# Altium PCB Inverter Processor PCB.PcbDoc (part 2 of 3)
Units mm, origin at the board's own origin, x right, y up, seen from the top; angles counter-clockwise.
Board outline 180 x 80 mm, 4 copper layers (Top Layer, Internal Plane 1, Internal Plane 2, Bottom Layer); 207 components, 146 nets, 658 pads, 294 vias.
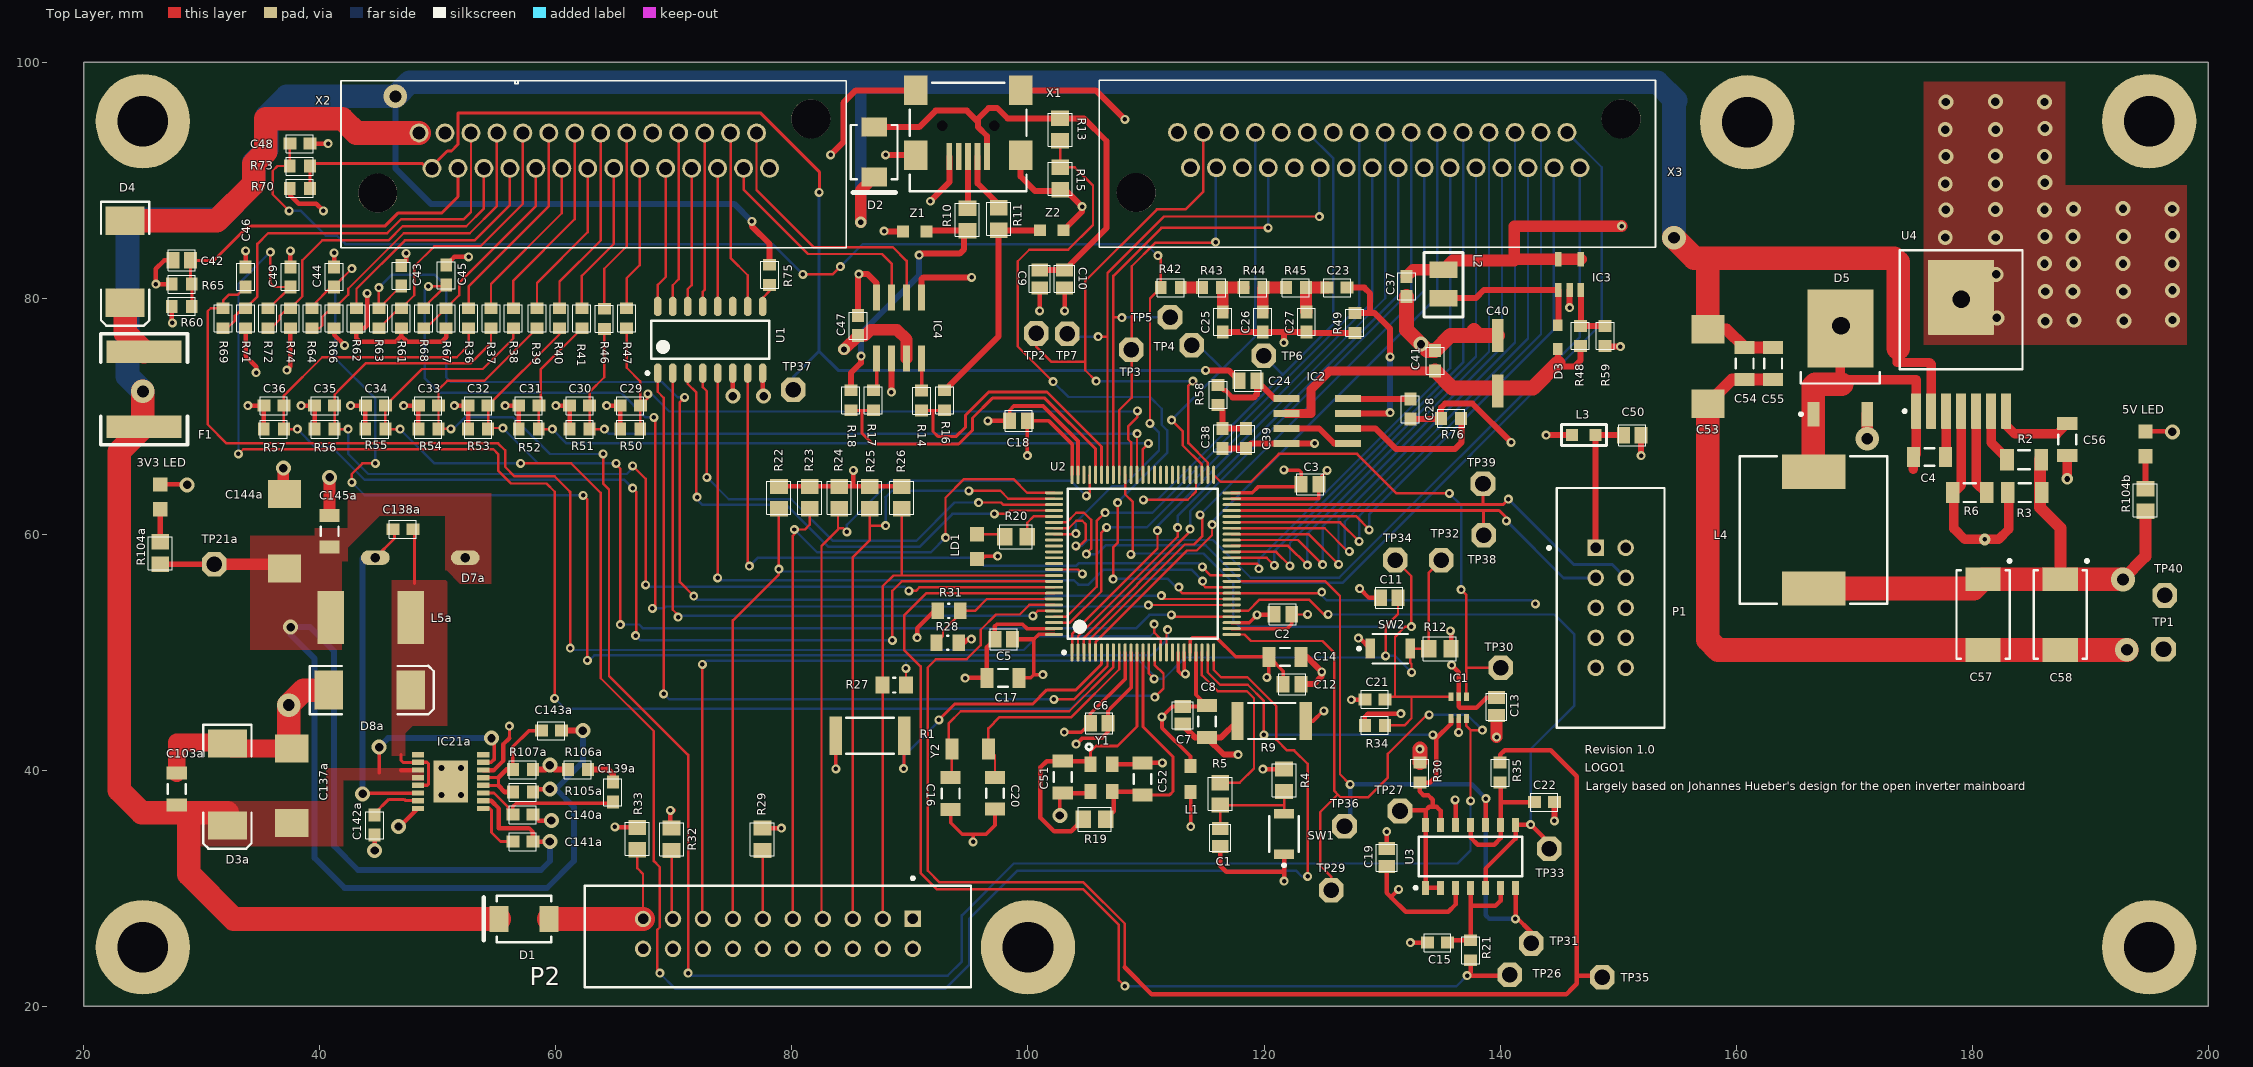
[diagram p0: Top Layer view]

## Via types
v1: diameter 0.762, hole 0.381, Top Layer to Bottom Layer, 220 vias
v2: diameter 1.27, hole 0.711, Top Layer to Bottom Layer, 56 vias
v3: diameter 1, hole 0.5, Top Layer to Bottom Layer, 7 vias
v4: diameter 2, hole 1, Top Layer to Bottom Layer, 7 vias
v5: diameter 3, hole 1.5, Top Layer to Bottom Layer, 2 vias
v6: diameter 1.27, hole 0.7, Top Layer to Bottom Layer, 1 vias
v7: diameter 1, hole 0.381, Top Layer to Bottom Layer, 1 vias

## Nets (pads, with @x,y where several pads share a name; then routed paths per layer and width w, separated by ;. In a path a pad name is that pad's centre, name@x,y a point inside that pad or via, vN(x,y) a via of type N, cw(c..) or ccw(c..) an arc to the next point about the centre after c; other vN are vias at no path point) (continued)
DGND: (continued)
  Top Layer w0.381: 26.472,64.222 28.724,64.222 v2(28.758,64.188) ; R65.1@27.45,81.2 v1(26.1,81.2) 26.1,82.5 26.8,83.2 C42.2@27.55,83.2 ; D3a.1@32.073,42.344 D3a.1@32.154,42.263 D3a.1@32.581,41.836 ; R71.1@33.7,77.45 33.7,75.1 34.6,74.2 v1(34.6,73.7) ; C46.2@33.7,82.65 v1(33.7,84) ; v1@33.9,70.9 C36.2@35.251,70.9 R57.1@35.25,68.9 R57.1@35.25,68.9 ; v1(37.2,73.9) 37.5,74.2 R74.1@37.5,77.45 ; C137a.-@37.361,42.446 C137a.-@38.123,41.684 ; C49.2@37.5,82.65 v1(37.5,84) ; v1(38.4,70.9) C35.2@39.551,70.9 R56.1@39.55,68.9 ; C48.2@39.15,93.1 v1(40.7,93.1) ; v1(41.199,83.845) 41.199,82.651 C44.2@41.2,82.65 ; R66.2@41.2,77.45 41.2,76.9 v1(42.1,76) ; v1(42.6,70.9) C34.2@43.851,70.9 R55.1@43.85,68.9 ; v2(44.633,33.2) C142a.2@44.633,34.509 C142a.2@44.633,34.636 ; v2(46.665,35.232) 46.774,35.232 IC21a.8@48.309,36.767 ; C43.2@46.9,82.75 47.3,83.15 v1(47.3,83.8) ; v1(47.1,70.9) C33.2@48.35,70.9 R54.1@48.35,68.9 ; C45.2@50.7,82.8 51.4,83.5 v1(52.6,83.5) ; v1(51.4,70.9) C32.2@52.551,70.9 R53.1@52.55,68.9 ; IC21a.14@53.845,40.017 54.752,40.017 55.555,40.82 55.555,42.217 56.063,42.725 ; v1(55.7,70.9) C31.2@56.851,70.9 ; R52.1@56.85,68.9 C31.2@56.851,70.9 ; C140a.2@58.056,36.248 58.564,35.74 v2(59.619,35.74) ; v2(59.492,40.439) v2@59.873,40.058 ; v1(60,70.9) C30.2@61.151,70.9 R51.1@61.15,68.9 ; v1(64.3,70.9) C29.2@65.451,70.9 R50.1@65.45,68.9 ; v1(65,35.2) 65.05,35.15 R33.2@66.9,35.15 ; R32.2@69.8,35.1 69.7,35.2 v1(69.7,36.6) v1@70,36.6 ; U1.6@74.98,73.65 74.98,71.72 v2(75,71.7) ; R29.2@77.5,35.1 v1(79.1,35.1) ; U1.8@77.52,73.65 77.52,71.78 v2(77.6,71.7) ; v1(90.602,51.232) 90.602,52.037 92.015,53.45 92.4,53.45 R31.1@92.35,53.5 ; v1(94.666,47.803) 94.691,47.828 C17.2@96.542,47.828 96.52,47.85 96.52,50.42 C5.2@97.2,51.1 97.2,52.2 ; v1(96.6,69.6) C18.2@98.45,69.6 ; v1(100.995,78.929) C9.2@100.995,80.879 ; C51.2@102.946,38.071 Y1.2@105.174,38.071 ; v1(103.095,78.929) C10.2@103.095,80.879 ; Y1.4@107.148,40.495 C52.2@109.579,40.495 ; C52.2@109.703,40.618 111.375,40.618 v1(111.379,40.615) ; C1.2@116.3,33.55 116.3,31.9 116.8,31.4 121.7,31.4 ; v1(121.7,30.6) 121.7,31.4 ; SW1.1@121.7,32.9 121.7,31.4 ; C27.2@123.6,77.15 C27.2@123.7,77.05 ; v1(127.406,45.974) 128.524,45.974 C21.2@128.55,46 ; v1(128,51.2) 128.1,51.2 SW2.1@129,50.3 ; v1(128.1,55.4) 128.9,54.6 C11.2@129.85,54.6 ; C19.2@130.4,33.35 v1(130.4,34.8) ; v1(132.4,25.4) C15.2@133.85,25.4 ; v1(136.2,37.5) 136.23,37.47 U3.12@136.23,35.36 ; v1(136.5,43.2) IC1.2@136.5,44.375 ; R59.1@148.9,75.95 R59.1@148.95,75.9 ; 194.684,68.709 196.936,68.709 v2(196.97,68.675)
  Top Layer w0.5: R107a.1@58.056,40.058 59.111,40.058 v2(59.492,40.439) ; v2@59.873,40.058 R106a.1@61.016,40.058
  Top Layer w0.508: v1(83.287,92.151) 84.353,93.218 84.353,96.545 85.42,97.612 87.833,97.612 87.836,97.615 X1.9@90.48,97.615 ; C47.2@85.626,78.523 C47.2@85.598,78.523 85.598,81.966 v1(85.674,82.042) 86.411,82.042 87.173,81.28 IC4.8@87.173,80.07 ; v1(87.808,85.674) 87.833,85.649 Z1.2@89.399,85.649 ; v1(87.935,92.151) 87.971,92.115 X1.7@90.48,92.115 ; v1(88.417,72.034) 88.443,72.06 IC4.2@88.443,74.87 ; v1(91.719,88.214) 93.33,89.824 X1.5@93.33,92.015 ; X1.6@99.38,92.115 99.38,90.308 100.584,89.103 102.662,89.103 R15.2@102.743,89.184 103.17,89.184 v1(104.597,87.757) 104.597,87.341 Z2.2@103.006,85.75 ; X1.8@99.38,97.615 105.737,97.615 v1(108.204,95.148) ; C38.1@116.484,67.273 118.44,67.273 C39.1@118.466,67.248 118.913,67.695 IC2.4@121.9,67.695 124.278,67.695 v1(124.282,67.691) ; C25.2@116.5,77.15 C26.2@119.9,77.15 121.691,77.15 ; v1(121.691,76.225) 121.691,77.15 ; C27.2@123.6,77.15 121.691,77.15 ; C27.2@123.7,77.05 R49.1@127.7,77.05 ; C28.1@132.4,69.75 134.929,69.75 R76.2@135.003,69.825 135.003,70.741 135.331,71.069 137.668,71.069 v1(140.945,67.793) v1@140.97,67.767 ; v1(144.6,35.7) C22.2@144.6,37.3 ; v1(145.9,79.2) IC3.2@145.9,80.7 ; R59.1@148.95,75.9 v1(150.2,75.9) ; v1(151.95,66.65) C50.2@151.95,68.4
  Top Layer w0.8: U4.4@179.07,70.426 179.07,64.139 178.457,63.525 178.457,60.481 179.375,59.563 v7(181.077,59.563) 182.245,59.563 183.105,60.423 R3.1@183.105,63.525 ; v3(188.062,64.694) C56.2@188.062,66.671
  Top Layer w1: v2(36.9,65.6) 36.9,63.514 C144a.-@37.013,63.401 ; C145a.2@40.823,61.601 v2(40.823,64.823) ; v1(139.7,42.8) C13.2@139.7,44.65 ; C53.-@157.607,71.069 159.661,73.123 C54.2@160.731,73.123 C55.2@163.144,73.123 ; D5.2@171.119,70.169 171.119,68.454 171.12,68.453 v4(171.12,68.097)
  Top Layer w1.27: C37.2@132.08,80.151 132.08,77.32 v6(133.3,76.1) 133.85,75.55 C41.1@134.5,75.55 135.8,76.85 138.2,76.85 ; 137.8,77.25 138.2,76.85 ; C40.-@139.8,76.85 138.2,76.85
  Top Layer w1.5: C103a.2@27.869,39.757 27.869,42.344 D3a.1@32.073,42.344 ; D3a.1@32.581,41.836 C137a.-@37.615,41.836
  Top Layer w2: C137a.-@37.361,42.446 v4(37.361,45.519) 38.631,46.789 D8a.1@40.744,46.789 ; C53.-@157.607,71.069 157.607,51.054 158.473,50.188 C57.2@180.924,50.188 C58.2@187.477,50.188 193.088,50.188 v4(193.116,50.216)
  other v1: 33.9,70.9
  other v2: 186.182,78.054 192.862,78.08 188.62,78.13 196.977,78.156 182.093,78.334 186.207,80.569 188.544,80.569 192.811,80.569 196.977,80.67 182.042,82.017 188.595,82.906 196.952,82.906 186.131,82.931 192.786,82.931 177.724,85.141 181.991,85.141 188.544,85.217 192.811,85.217 186.157,85.242 196.977,85.319 177.775,87.478 186.131,87.478 181.966,87.503 188.595,87.554 196.952,87.554 192.786,87.579 177.724,89.687 181.991,89.687 186.157,89.789 177.775,92.024 186.131,92.024 181.966,92.05 177.724,94.285 181.991,94.285 186.157,94.386 177.775,96.622 186.131,96.622 181.966,96.647
  other v3: 50.315,37.899 51.966,37.899 50.315,40.185 51.966,40.185
  other v5: 179.07,79.908
DISC: U2.18
ENC_A/S2: R67.2 R68.2 X2.10 | length 17.6
  Top Layer w0.203: R68.2@48.8,77.45 49,77.45 R67.2@50.7,79.15 51.8,80.25 51.8,81.3 58.3,87.8 X2.10@58.3,91
ENC_B/S3: R61.2 R63.2 X2.9 | length 24
  Top Layer w0.203: R63.2@45,77.45 46.7,79.15 R61.2@46.9,79.15 48,80.25 48,82.7 49.7,84.4 53.6,84.4 57.2,88 X2.9@57.2,94